# Altium PCB Servo.PcbDoc
Units mm, origin at the board's own origin, x right, y up, seen from the top; angles counter-clockwise.
Board outline 10 x 19.4 mm, 2 copper layers (Top Layer, Bottom Layer); 15 components, 21 nets, 87 pads, 31 vias.
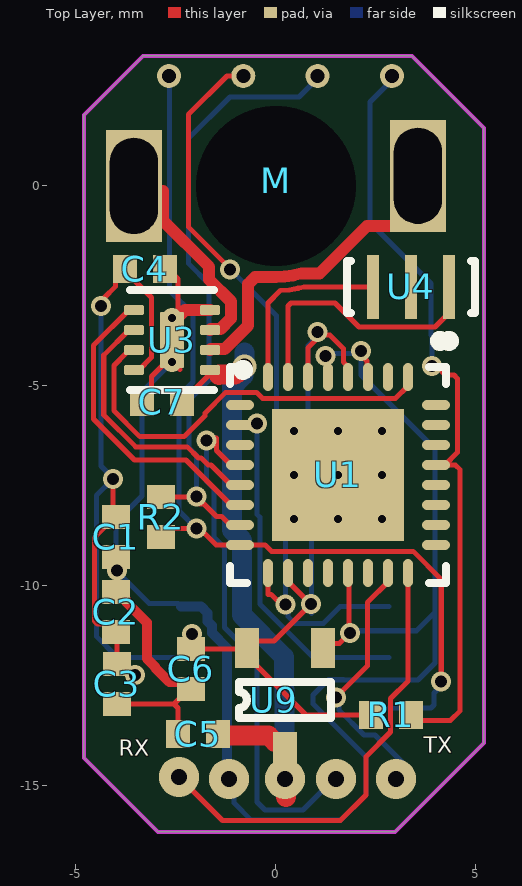
[diagram p0: Top Layer view]
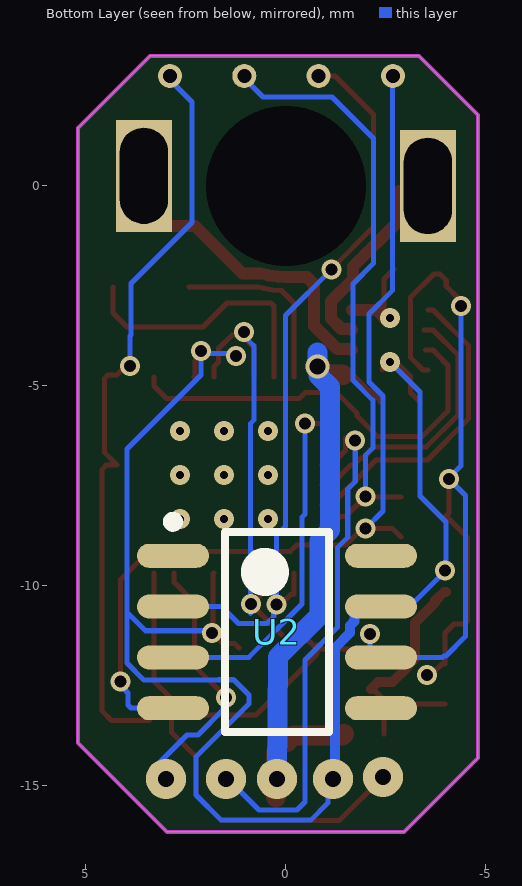
[diagram p1: Bottom Layer view, seen from below]
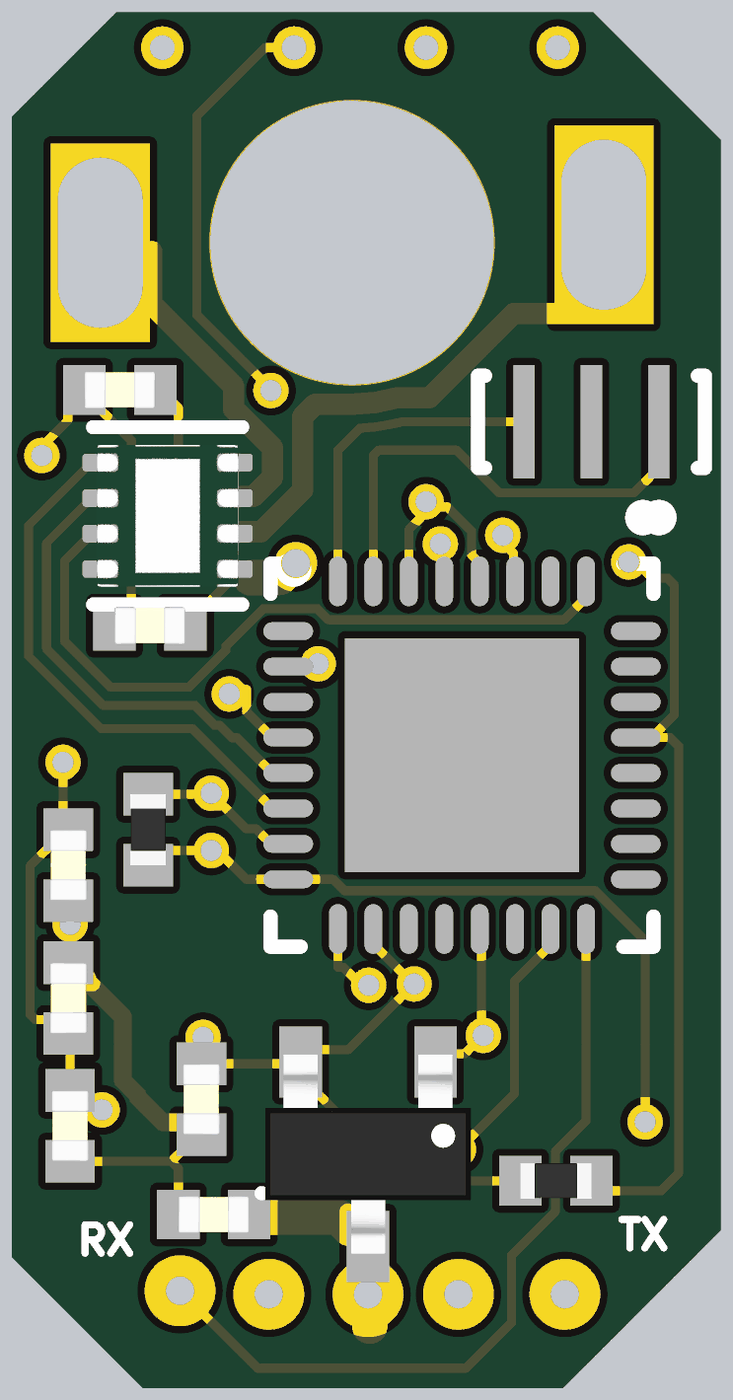
[diagram p2: 3D render of the assembled board from above, using the file's embedded part models]

## Layer stack, top to bottom
Top Solder: solder mask 0.0102, Solder Resist, Dk 3.5
Top Layer: signal copper 0.0356
Dielectric 1: dielectric 0.32, FR-4, Dk 4.8
Bottom Layer: signal copper 0.0356
Bottom Solder: solder mask 0.0102, Solder Resist, Dk 3.5

## Board outline
-4.8,-14.3 -4.8,1.775 -3.325,3.25 3.4,3.25 5.2,1.45 5.2,-13.925 2.975,-16.15 -2.95,-16.15

## Design rules (kind name [scope] priority, off if disabled: settings)
Clearance [All] p1: gap=0.127 ignorepadtopadclearanceinfootprint=FALSE
ComponentClearance [All] p1: gap=0.127 collisioncheckmode=3 verticalgap=0.254 showdistances=FALSE
PolygonConnect [All] p1: connectstyle=Relief reliefconductorwidth=0.254 reliefentries=4 polygonreliefangle="90 Angle" airgapwidth=0.254
RoutingVias [All] p1: holewidth=0.3 width=0.5 viastyle="Through Hole" minholewidth=0.3 minwidth=0.5 maxholewidth=0.711 maxwidth=1.27
SolderMaskExpansion [All] p1: expansion=0.102 istentingtop=FALSE
Width [All] p1: maxlimit=0.5 minlimit=0.127 preferedwidth=0.127 minimp=50.000000 maximp=50.000000 favimp=50.000000
29 further rules are at their usual default settings.

## Components (designator, comment, footprint, x,y, rotation, side; value= is the part's Value field where it differs from the comment)
C1 "CAP_0402_25V" CAP_0402 -4,-8.775 r90 top value=100n
C2 "CAP_0402_25V" CAP_0402 -4,-10.65 r270 top value=100n
C3 "CAP_0402_25V" CAP_0402 -3.975,-12.45 r90 top value=100n
C4 "CAP_0402_25V" CAP_0402 -3.275,-2.075 r180 top value=100n
C5 "CAP_0402_25V" CAP_0402 -1.95,-13.7 r0 top value=1u
C6 "CAP_0402_25V" CAP_0402 -2.125,-12.075 r90 top value=1u
C7 "CAP_0402_25V" CAP_0402 -2.85,-5.4 r0 top value=100n
M "Motor" PCBComponent_1 0,0 r180 top
R1 "RES_0402" RES_0402 2.875,-13.225 r180 top value=1k
R2 "RES_0402" RES_0402 -2.875,-8.275 r270 top value=4.7k
U1 "ATmega328P-MU" 32M1-A_L 1.55,-7.225 r270 top
U2 "TLE5012B E3005" INF-PG-DSO-8-16_N 0.225,-11.15 r180 bottom
U3 "DRV8837DSGR" FP-DSG0008A-MFG -2.6,-3.85 r180 top
U4 "CSTCE16M0V53-R0" MURA-CSTCE_V-3_V 3.375,-2.525 r180 top
U9 "XC6206P332MR" SOT23-3 0.225,-12.85 r0 top

## Footprints (in the part's own frame and the unit in brackets; to place one, negate y for a bottom-side part, rotate by r counter-clockwise, add the part's x,y. Pads: shape width x height; smd on the part's side, far side on the other; paste and mask are expansions set on the pad)
32M1-A_L [mm] "QFN, 32-Leads, Body 5x5mm, Pitch 0.5mm, Thermal Pad 3.3x3.3mm, IPC High Density"
  oval 0.7x0.25 smd: 1(-2.45,1.75) 2(-2.45,1.25) 3(-2.45,0.75) 4(-2.45,0.25) 5(-2.45,-0.25) 6(-2.45,-0.75) 7(-2.45,-1.25) 8(-2.45,-1.75) 17(2.45,-1.75) 18(2.45,-1.25) 19(2.45,-0.75) 20(2.45,-0.25) 21(2.45,0.25) 22(2.45,0.75) 23(2.45,1.25) 24(2.45,1.75)
  oval 0.25x0.7 smd: 9(-1.75,-2.45) 10(-1.25,-2.45) 11(-0.75,-2.45) 12(-0.25,-2.45) 13(0.25,-2.45) 14(0.75,-2.45) 15(1.25,-2.45) 16(1.75,-2.45) 25(1.75,2.45) 26(1.25,2.45) 27(0.75,2.45) 28(0.25,2.45) 29(-0.25,2.45) 30(-0.75,2.45) 31(-1.25,2.45) 32(-1.75,2.45)
  rect 3.3x3.3 smd: 33(0,0)
  silkscreen extent -3.47,-2.7 2.7,2.7, body extent -2.55,-2.55 2.55,2.55, height 1
CAP_0402 [mm]
  rect 0.6x0.7 smd: 1(-0.5,0) 2(0.5,0)
  body extent -0.5,-0.26 0.5,0.26, height 0.37
FP-DSG0008A-MFG [mm]
  rrect40% 0.5x0.25 smd paste+0 mask+0: 1(-0.95,0.75) 2(-0.95,0.25) 3(-0.95,-0.25) 4(-0.95,-0.75) 5(0.95,-0.75) 6(0.95,-0.25) 7(0.95,0.25) 8(0.95,0.75)
  rrect11% 0.6x1.4 smd paste-1000 mask+0: 9(0,0)
  silkscreen extent -1.9,-1.25 1.05,1.25, body extent -1.3,-1.15 1.3,1.15, height 0.25
INF-PG-DSO-8-16_N [mm] "SOP, 8-Leads, Body 4.9x3.9mm, Pitch 1.27mm, IPC Medium Density"
  oval 1.8x0.6 smd: 1(-2.6,1.905) 2(-2.6,0.635) 3(-2.6,-0.635) 4(-2.6,-1.905) 5(2.6,-1.905) 6(2.6,-0.635) 7(2.6,0.635) 8(2.6,1.905)
  silkscreen extent -2.73,-2.5 1.3,2.88, body extent -2,-2.5 2,2.5, height 1.75
MURA-CSTCE_V-3_V [mm] "SMD, 3-Leads, Body 3.2x1.3mm, Pitch 0.95mm"
  rect 0.3x1.6 smd: 1(-0.95,0) 2(0,0) 3(0.95,0)
  silkscreen extent -1.6,-0.65 1.6,1.47, body extent -1.6,-0.65 1.6,0.65, height 1
PCBComponent_1 [mm]
  rect 1x1.8 hole 4: 0(0,0)
  rect 1.4x2.8 / inner rect 1x1.8 / far side rect 1.4x2.8 hole 1.2 slot 2.4 at 90 deg: 1(-3.55,-0.254) 2(3.55,0)
RES_0402 [mm]
  rect 0.6x0.7 smd: 1(-0.5,0) 2(0.5,0)
  body extent -0.5,-0.25 0.5,0.25, height 0.3
SOT23-3 [mm] "SOT23-3"
  round 0.2 on Top Overlay: 1(-1.5,-0.55)
  rect 0.6x1 smd: 1(0.95,1.3) 2(0,-1.3) 3(-0.95,1.3)
  silkscreen extent -1.15,-0.45 1.15,0.45, body extent -1.45,-1.4 1.45,1.4, height 1.3

## Part data
C1 C2 C3 C4 C7: library part CMP-004-000008-2, "Capacitor SMD 0402 25V", JLC=C307331, Design Item ID=CAP_0402_25V, Source=Schematic-Lib-PhilsLab.SchLib
C5 C6: library part CMP-004-000008-2, "Capacitor SMD 0402 25V", JLC=C52923, Design Item ID=CAP_0402_25V, Source=Schematic-Lib-PhilsLab.SchLib
M: "Existing servo dc motor"
R1: library part CMP-015-000001-1, "Resistor SMD 0402", JLC=C11702, Design Item ID=RES_0402, Source=Schematic-Lib-PhilsLab.SchLib
R2: library part CMP-015-000001-1, "Resistor SMD 0402", JLC=C25900, Design Item ID=RES_0402, Source=Schematic-Lib-PhilsLab.SchLib
U1: library part CMP-0095-00077-2, "8-bit AVR Microcontroller, 32KB Flash, 1KB EEPROM, 2KB SRAM, 32-pin MLF, Industrial Grade (-40°C to 85°C)", JLC=C7499261, Code_JEDEC=MO-220-VHHD-2, ComponentLink1Description="Manufacturer URL", ComponentLink1URL=http://www.atmel.com/, ComponentLink2Description="ATmega48A/48PA/88A/88PA/168A/168PA/328/328P Datasheet", ComponentLink2URL=http://www.atmel.com/dyn/resources/prod_documents/8271.pdf, ComponentLink3Description="ATmega48A/48PA/88A/88PA/168A/168PA/328/328P Summary", ComponentLink3URL=http://www.atmel.com/dyn/resources/prod_documents/8271S.pdf, DatasheetVersion="revD, May-2011", PackageDescription="32-Pin Micro Lead Frame Package (MLF),  5 x 5 x 1.0 mm Body, Pitch 0.50 mm, 3.10mm Exposed Pad", PackageReference=32M1-A, PackageVersion="revE, May-2006", RevisionNote="DatasheetVersion updated. URLs added."
U2: library part CMP-1135-00008-1, "GMR-Based Angle Sensor, PG-DSO-8-16, Reel, Green", Manufacturer=Infineon, ComponentLink1Description="Manufacturer URL", ComponentLink1URL=http://www.infineon.com/, ComponentLink2Description=Datasheet, ComponentLink2URL=http://www.infineon.com/dgdl/TLE5012B_FDS_Rev1+1.pdf?folderId=db3a30431ce5fb52011d3dd6e8012582&fileId=db3a304334fac4c601350f31c43c433f, ComponentLink3Description="Package Specification", ComponentLink3URL=http://www.infineon.com/dgdl/TLE7259-2GE_DS_rev12.pdf?folderId=db3a3043163797a6011666d32a0c0de1&fileId=db3a3043163797a6011666d4dbb80de2&location=en.Products.Automotive_ICs.Automotive_Transceivers.LIN_Transceivers.DATASHEET.TLE7259-2GE_DS_rev12.pdf, DatasheetVersion="Rev. 1.1", Green=TRUE, Halogen-free=available, Interface="SPI, HSM", Mounting Technology="Surface Mount", PackageDescription="8-Pin Plastic (Green) Dual Small Outline Package, 4.9 x 3.9 mm Body, 1.27 mm Pitch", PackageReference=PG-DSO-8-16, PackageVersion=Mar-07, Packing=Reel, PartNumber="TLE5012B E3005"
U3: library part CMP-04915-000004-1, "IC MOTOR DRIVER PAR 8WSON", Ambient Temperature Range High=+85°C, Ambient Temperature Range Low=-40°C, JLC=C39159, Manufacturer="Texas Instruments", Max Junction Temp=+150°C, Max Supply Voltage=7V, Min Supply Voltage=1.8V, Nominal Supply Current=300-700uA, Output Current=1.8A, Output Voltage=0-11V, Package=DSG0008A, Switching Frequency=0-250kHz, Temperature="-40°C to +85°C", Automotive=No, Category=IC, ComponentLink2Description=Datasheet, ComponentLink2URL=http://www.ti.com/lit/ds/symlink/drv8837.pdf, Device Class L1="Integrated Circuits (ICs)", Device Class L2="Power Management ICs", Device Class L3="Motor Drivers", Digikey Description="IC MOTOR DRIVER PAR 8WSON", Height=0.8mm, Lead Free=Yes, Manufacturer Part Number=DRV8837DSGR, Motor Type=Brushed, Mouser Description="Motor / Motion / Ignition Controllers & Drivers 1.8A Low Vltg Brush DC Motor Driver", Number Of Outputs=2, Octopart=https://octopart.com/drv8837dsgr-texas+instruments-23786726, RoHS=TRUE, Standoff Height=0mm, Temperature Range High=+85°C, Temperature Range Low=-40°C
U4: library part CMP-0588-00001-2, "Ceramic Resonator, 16 MHz with Built-in Capacitance, Thickness Expander Mode, Initial Frequency Tolerance +/- 0.5%, Load Capacity 15 pF, -20 to 80 degC, 3.2 x 1.3 x 1 mm SMD, RoHS, Reel", Initial Frequency Tolerance="+/- 0.5%", JLC=C32180, Load Capacity="15 pF", Manufacturer=Murata, Operating Temperature Range="-20 to 80 degC", Oscillating Frequency="16 MHz", ComponentLink1Description="Manufacturer URL", ComponentLink1URL=http://www.murata.com/, ComponentLink2Description=Datasheet, ComponentLink2URL=http://www.murata.com/products/catalog/pdf/p16e.pdf, DatasheetVersion="Rev. P16E-22", Initial Tolerance="+/- 0.5%", Mounting Technology="Surface Mount", PackageDescription="3-Pin SMD, Body 3.2 x 1.3 mm, Pitch 0.95 mm", PackageReference=CSTCE_V-3, Packing=Reel, PartNumber=CSTCE16M0V53-R0, RoHS=TRUE
U9: JLC=C5446

## Free pads (board coordinates)
  round 1 hole 0.4: 1(1.5,-14.825) 2(0.225,-14.825) 3(-1.175,-14.825) 5(-2.425,-14.775) 5(3,-14.825)
  round 0.6 hole 0.35: 4(-2.675,2.75) 6(-0.817,2.75) 7(1.042,2.75) 8(2.9,2.75)

## Via types
v1: diameter 0.5, hole 0.3, Top Layer to Bottom Layer, 19 vias
v2: diameter 0.5, hole 0.2, Top Layer to Bottom Layer, 11 vias
v3: diameter 0.6, hole 0.4, Top Layer to Bottom Layer, 1 vias

## Nets (pads, with @x,y where several pads share a name; then routed paths per layer and width w, separated by ;. In a path a pad name is that pad's centre, name@x,y a point inside that pad or via, vN(x,y) a via of type N, cw(c..) or ccw(c..) an arc to the next point about the centre after c; other vN are vias at no path point)
3V3: C1.2 C2.2 C3.2 C4.2 C6.2 R1.2 U1.4 U1.6 U1.18 U2.6 U3.8 U9.3 | length 40.3
  Top Layer w0.127: v1(-4.373,-3) -4.302,-2.929 -4.302,-2.802 -4.008,-2.508 -4.008,-2.362 -3.846,-2.2 -3.7,-2.2 -3.11,-2.791 -3.11,-4.284 -3.425,-4.6 U3.8 ; v1(-4.075,-7.325) -4.075,-8.175 -3.975,-8.275 C1.2 -4.025,-8.275 -4.541,-8.79 -4.541,-10.876 -4.466,-10.951 -4.199,-10.951 C2.2 -3.975,-11.175 C3.2 -3.901,-11.95 -3.697,-12.154 -3.596,-12.154 v1(-3.525,-12.225) ; C6.2 C6.2@-2.075,-11.575 ; v1(-2.101,-11.202) -2.101,-11.549 C6.2@-2.075,-11.575 ; U9.3@-0.775,-11.572 -0.775,-11.7 0.75,-13.225 R1.2 ; U9.3@-0.775,-11.55 -0.775,-11.475 -0.875,-11.575 C6.2@-2.075,-11.575 ; U9.3@-0.739,-11.536 -0.578,-11.375 -0.05,-11.375 v1(0.875,-10.45) 0.863,-10.45 0.3,-9.887 U1.18 ; U1.6 0.8,-4.048 v1@1.1,-3.748 ; v1@1.102,-3.723 1.344,-3.723 1.685,-4.064 1.685,-4.307 1.685,-4.401 1.8,-4.517 U1.4
  Bottom Layer w0.127: v1@-4.373,-2.926 v1(-4.373,-3) -4.373,-7 -4.075,-7.298 v1(-4.075,-7.325) -4.491,-7.741 -4.491,-11.26 -4,-11.75 -3.95,-11.75 -3.915,-11.785 U2.6 -2.32,-11.785 -2.101,-11.567 v1(-2.101,-11.202) ; v1@0.89,-10.684 0.89,-5.943 0.804,-5.856 0.804,-3.993 1.044,-3.753 v1(1.044,-3.652)
D3~: U1.1 U3.7 | length 10.4
  Top Layer w0.127: U3.7@-3.494,-4.1 -3.675,-4.1 -3.737,-4.162 -3.737,-4.171 -4.052,-4.486 -4.052,-5.618 -3.402,-6.267 -2.298,-6.267 -1.777,-5.746 -1.777,-5.68 -1.256,-5.159 -0.487,-5.159 -0.331,-5.316 2.984,-5.316 3.3,-5 U1.1
D6~: U1.10 U2.3 | length 8.8
  Top Layer w0.127: U1.10 -0.861,-5.936 v1(-0.477,-5.936)
  Bottom Layer w0.127: v1(-0.477,-5.936) -0.477,-8.208 -0.403,-8.282 -0.403,-10.453 0.928,-11.785 U2.3
D9~: U1.13 U3.6 | length 6.7
  Top Layer w0.127: U3.6@-3.456,-3.6 -3.675,-3.6 -4.306,-4.231 -4.306,-5.723 -3.508,-6.521 -2.22,-6.521 -1.939,-6.802 -1.87,-6.802 -1.694,-6.978 -1.622,-6.978 -1.125,-7.475 U1.13
D10/SS: U1.14 U3.5 | length 7.8
  Top Layer w0.127: U3.5 -3.675,-3.1 -4.56,-3.985 -4.56,-5.828 -3.538,-6.85 -2.25,-6.85 -1.125,-7.975 U1.14
D11~/MOSI: pad.7 R2.1 U1.15 | length 15.7
  Top Layer w0.127: R2.1 -2.075,-7.775 -1.906,-7.944 v1@-1.84,-7.944 ; v1@-2.037,-7.813 v1(-1.985,-7.761) ; -1.8,-7.95 -1.488,-8.262 -1.358,-8.262 -1.144,-8.475 U1.15
  Bottom Layer w0.127: -2.191,0.38 -2.191,-1.934 -1.675,-2.45 -1.675,-4.859 -2.172,-5.356 -2.172,-6.544 -1.985,-6.73 v1(-1.985,-7.761) ; -2.191,0.381 -2.191,1.184 -1.15,2.225 0.575,2.225 pad.7@1.1,2.75
D12/MISO: pad.4 R2.2 U1.16 U2.4 | length 23.8
  Top Layer w0.127: R2.2 -2.668,-8.568 -1.9,-8.568 -1.493,-8.975 -1.005,-8.975 U1.16 -0.269,-8.975 -0.11,-9.134 3.431,-9.134 4.132,-9.836 v1(4.132,-12.395)
  Bottom Layer w0.127: pad.4@-2.659,2.635 -2.659,-2.618 -2.075,-3.202 -2.075,-4.9 -2.426,-5.251 -2.426,-8.128 v1(-1.985,-8.568) ; U2.4 2.828,-13.052 3.876,-13.052 3.95,-12.978 3.95,-12.678 4.132,-12.495 v1(4.132,-12.395)
D13/SCK: pad.6 U1.17 U2.2 | length 19.4
  Top Layer w0.127: v1(-1.144,-2.084) -1.144,-2.067 -2.191,-1.02 -2.191,1.784 -1.225,2.75 pad.6 ; U1.17 -0.2,-10.216 -0.119,-10.216 0.133,-10.468 v1(0.234,-10.468)
  Bottom Layer w0.127: v1(-1.144,-2.084) 0.009,-3.237 0.009,-8.507 0.234,-8.732 0.234,-10.336 v1@0.381,-10.483 ; v1(0.234,-10.468) 0.249,-10.483 v1@0.381,-10.483 ; U2.2 1.608,-10.515 1.184,-10.938 0.476,-10.938 0.306,-10.768 0.306,-10.558 v1@0.381,-10.483
GND: C1.1 C2.1 C3.1 C4.1 C5.1 C6.1 C7.1 pad.3 U1.3 U1.5 U1.21 U2.7 U3.4 U3.9 U9.1@1.175,-11.55 | length 49.1
  Top Layer w0.127: C3.1 -2.55,-12.95 ; C7.1 -3.113,-5.163 -3.113,-4.764 -2.75,-4.4 v2(-2.6,-4.4) -2.587,-4.4 -2.4,-4.587 ; C4.1@-2.7,-2.075 -2.45,-2.325 U3.9@-2.45,-3.213 ; C5.1 -2.45,-13.05 -2.55,-12.95 ; C6.1 -2.175,-12.575 -2.55,-12.95 ; U9.1@1.175,-11.55 1.291,-11.434 1.591,-11.434 v1(1.85,-11.175) ; U1.21 1.824,-9.699 v1@1.824,-11.149 ; v1(2.125,-4.125) 2.125,-4.226 2.276,-4.377 2.276,-4.751 U1.3
  Top Layer w0.25: C2.1 -3.95,-10.15 -3.731,-10.369 -3.731,-10.413 -3.23,-10.914 -3.23,-11.81 -3.023,-12.017 -3.023,-12.043 -2.666,-12.4 -2.3,-12.4 C6.1
  Top Layer w0.3: v2(-2.6,-3.3) -2.45,-3.3 -2.45,-3.276 -2.274,-3.1 U3.4
  Bottom Layer w0.127: v2(-2.6,-4.4) -3.35,-5.15 -3.35,-7.75 -4,-8.4 -4,-9.609 -3.168,-10.441 -2.449,-10.441 U2.7 ; pad.3@-1.5,-14.972 -1.306,-14.972 -1.05,-15.228 -1.05,-15.422 -0.618,-15.854 1.621,-15.854 2.25,-15.225 2.25,-14.269 0.925,-12.944 0.925,-12.725 1.3,-12.35 1.312,-12.35 1.318,-12.344 1.682,-12.344 1.688,-12.35 3.554,-12.35 3.975,-11.929 3.975,-10.659 ; v1(1.244,-4.246) 1.305,-4.186 2.064,-4.186 v1(2.125,-4.125) 2.125,-4.186 2.125,-4.725 3.975,-6.575 3.975,-10.659 ; v1@1.811,-11.214 v1(1.85,-11.175) ; v1@1.905,-11.12 3.513,-11.12 3.975,-10.659
  Bottom Layer w0.25: U2.7 -1.87,-10.515 -1.708,-10.677 -1.708,-10.885 -1.6,-10.993 -1.6,-11.171 -1.223,-11.548 -1.223,-14.695 pad.3@-1.5,-14.972
  other v1: -3.975,-9.609
IFA: U2.5
IFB: U2.8
IFC: U2.1
NetM_1: M.1 U3.2 | length 8
  Top Layer w0.3: U3.2 -1.625,-4.075 -1.284,-4.075 -0.696,-3.487 -0.696,-2.453 -0.608,-2.365 -0.52,-2.277 0,-2.277 ccw(c0,0) 0.642,-2.184 1.091,-2.184 2.279,-0.996 3,-0.996 3.55,-0.446 M.1
NetM_2: M.2 U3.3 | length 4.5
  Top Layer w0.3: -2.825,-0.125 -2.825,-0.867 -1.671,-2.021 -1.671,-2.342 -1.123,-2.89 -1.123,-3.31 -1.388,-3.575 -1.625,-3.575 U3.3
NetU1_7: U1.7 U4.1 | length 6.9
  Top Layer w0.127: U1.7 0.3,-2.999 0.374,-2.925 1.475,-2.925 2.075,-3.525 3.975,-3.525 4.325,-3.175 U4.1
NetU1_8: U1.8 U4.3 | length 4.6
  Top Layer w0.127: U1.8 -0.2,-2.925 0.11,-2.615 ccw(c0,0) 0.558,-2.557 0.706,-2.525 U4.3
Reset: pad.8 R1.1 U1.29 | length 18.8
  Top Layer w0.127: R1.1@3.418,-13.366 4.359,-13.366 4.604,-13.121 4.604,-7.094 4.485,-6.975 4.225,-6.975 4.541,-6.659 4.541,-4.818 4.451,-4.729 4.23,-4.729 4.001,-4.5 v1(3.9,-4.5)
  Bottom Layer w0.127: pad.8@2.9,2.65 2.35,2.1 2.35,-0.915 3.875,-2.44 3.875,-3.725 3.9,-3.75 v1(3.9,-4.5)
Sig: pad.1 U1.12 | length 13.2
  Top Layer w0.127: v1(-1.731,-6.361) -1.666,-6.296 -1.489,-6.296 -1.489,-6.611 -1.125,-6.975 U1.12
  Bottom Layer w0.127: v1(-1.731,-6.361) -1.731,-7.392 -1.545,-7.578 -1.545,-8.782 -1.284,-9.042 -1.284,-11.04 -0.475,-11.85 -0.475,-15.402 -0.277,-15.6 0.677,-15.6 1.152,-15.125 pad.1@1.5,-14.85
SoftSer_RX: pad.5@-2.425,-14.775 U1.24 | length 11.4
  Top Layer w0.127: pad.5@-2.425,-14.775 -1.334,-15.866 1.609,-15.866 2.25,-15.225 2.25,-14.269 2.865,-13.654 2.865,-12.815 3.3,-12.381 U1.24
SoftSer_TX: pad.5@3,-14.825 U1.23 | length 6.2
  Top Layer w0.127: v1(1.5,-12.785) 2.29,-11.994 2.29,-10.41 2.8,-9.9 U1.23
  Bottom Layer w0.127: v1(1.5,-12.785) 1.571,-12.856 1.571,-13.095 2.2,-13.724 2.474,-13.724 pad.5@3.225,-14.475
VCC: C5.2 C7.2 pad.2 U3.1 U9.2 | length 16.8
  Top Layer w0.127: C7.2 -2.35,-5.35 -2.113,-5.113 -2.063,-5.113 -1.675,-4.725 -1.425,-4.725
  Top Layer w0.5: C5.2 -1.412,-13.738 -0.188,-13.738 -0.025,-13.9 0.175,-13.9 0.225,-13.95 U9.2 0.25,-14.175 0.25,-15.275 pad.2@0.225,-14.8 ; -1.425,-4.725 -1.419,-4.719 -1.019,-4.719 -0.819,-4.519 v3(-0.792,-4.519)
  Bottom Layer w0.5: -0.792,-4.169 v3(-0.792,-4.519) -0.811,-4.538 -0.811,-4.739 -1.104,-5.032 -1.104,-8.599 -0.844,-8.859 -0.844,-10.731 0.203,-11.778 pad.2@0.225,-14.8
pads on no net: M.0 U1.2 U1.9 U1.11 U1.19 U1.20 U1.22 U1.25 U1.26 U1.27 U1.28 U1.30 U1.31 U1.32 U1.33 U4.2 U9.1@-1.275,-13.4
copper on no net:
  other v2: 0.45,-8.325 1.55,-8.325 2.65,-8.325 0.45,-7.225 1.55,-7.225 2.65,-7.225 0.45,-6.125 1.55,-6.125 2.65,-6.125

## Keep-outs
Keep-Out Layer:
  the board outline again, w0.1

## Silkscreen, mask and mechanical layers (free items; w line width, h text height)
Top Overlay:
  text "TX" at 3.7,-14.175 h0.4
  text "RX" at -3.925,-14.25 h0.4